# Altium PCB Accumulator_HotDog.PcbDoc
Units mm, origin at the board's own origin, x right, y up, seen from the top; angles counter-clockwise.
Board outline 537 x 59 mm, 2 copper layers (Top Layer, Bottom Layer), stack 1.57 mm thick; 117 components, 86 nets, 238 pads, 157 vias.
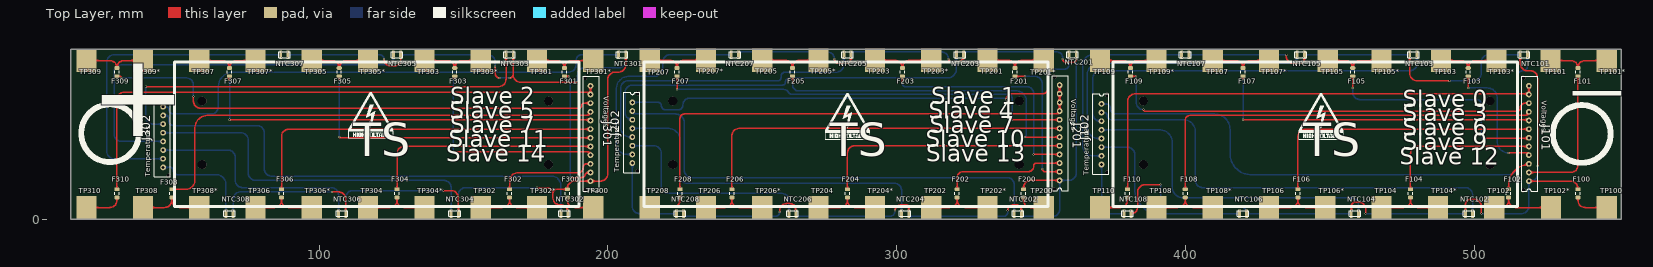
[diagram p0: Top Layer view]
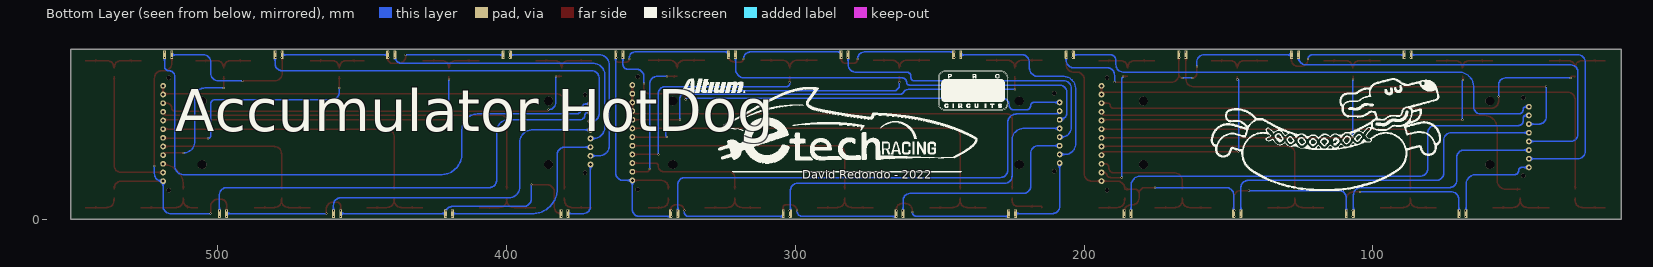
[diagram p1: Bottom Layer view, seen from below]
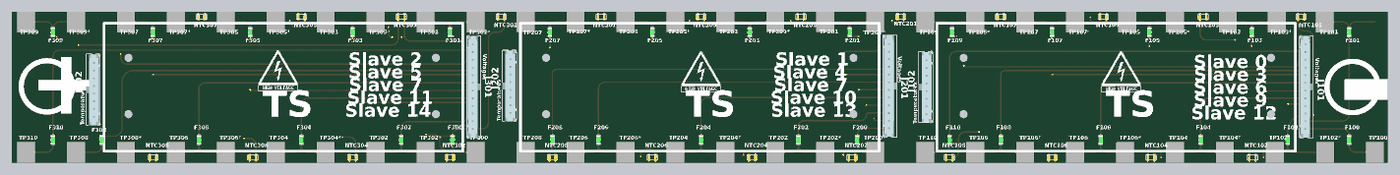
[diagram p2: 3D render of the assembled board from above, using the file's embedded part models]

## Layer stack, top to bottom
Top Solder: solder mask 0.01, Solder Resist, Dk 3.5
Top Layer: signal copper 0.035
Dielectric 1: dielectric 1.5, FR-4, Dk 4.8
Bottom Layer: signal copper 0.035
Bottom Solder: solder mask 0.01, Solder Resist, Dk 3.5

## Board outline
14,0 14,59 551,59 551,0

## Design rules (kind name [scope] priority, off if disabled: settings)
Clearance [All] p1: gap=0.6 ignorepadtopadclearanceinfootprint=FALSE except(0: Arc-Hole Track-Hole SMDPad-Hole THPad-Hole Via-Hole Fill-Hole Poly-Hole Region-Hole Text-Hole)
PolygonConnect [All] p1: connectstyle=Relief reliefconductorwidth=0.254 reliefentries=4 polygonreliefangle="90 Angle" airgapwidth=0.254
RoomDefinition Accumulator_HotDog [InComponentClass('Accumulator_HotDog')] p1: confinementstyle=ConfineIn formatcopy=TRUE lockcomponents=FALSE outline 0,0 551,0 551,59.5 0,59.5
RoutingVias [All] p1: holewidth=0.3 width=0.7 viastyle="Through Hole" minholewidth=0.2 minwidth=0.3 maxholewidth=20 maxwidth=30
SolderMaskExpansion [All] p1: expansion=0.102 istentingtop=FALSE
Width [All] p1: maxlimit=5 minlimit=0.2 preferedwidth=1
30 further rules are at their usual default settings.

## Components (designator, comment, footprint, x,y, rotation, side; value= is the part's Value field where it differs from the comment)
F100 "0437001.WRA" Fuse_1206 536,9 r90 top
F101 "0437001.WRA" Fuse_1206 536,51 r270 top
F102 "0437001.WRA" Fuse_1206 512,9 r90 top
F103 "0437001.WRA" Fuse_1206 498,51 r270 top
F104 "0437001.WRA" Fuse_1206 478,9 r90 top
F105 "0437001.WRA" Fuse_1206 458,51 r270 top
F106 "0437001.WRA" Fuse_1206 439,9 r90 top
F107 "0437001.WRA" Fuse_1206 420,51 r270 top
F108 "0437001.WRA" Fuse_1206 400,9 r90 top
F109 "0437001.WRA" Fuse_1206 381,51 r270 top
F110 "0437001.WRA" Fuse_1206 380,9 r90 top
F200 "0437001.WRA" Fuse_1206 344,9 r90 top
F201 "0437001.WRA" Fuse_1206 341,51 r270 top
F202 "0437001.WRA" Fuse_1206 321,9 r90 top
F203 "0437001.WRA" Fuse_1206 302,51 r270 top
F204 "0437001.WRA" Fuse_1206 283,9 r90 top
F205 "0437001.WRA" Fuse_1206 264,51 r270 top
F206 "0437001.WRA" Fuse_1206 243,9 r90 top
F207 "0437001.WRA" Fuse_1206 224,51 r270 top
F208 "0437001.WRA" Fuse_1206 225,9 r90 top
F300 "0437001.WRA" Fuse_1206 186,9 r90 top
F301 "0437001.WRA" Fuse_1206 185,51 r270 top
F302 "0437001.WRA" Fuse_1206 166,9 r90 top
F303 "0437001.WRA" Fuse_1206 147,51 r270 top
F304 "0437001.WRA" Fuse_1206 127,9 r90 top
F305 "0437001.WRA" Fuse_1206 107,51 r270 top
F306 "0437001.WRA" Fuse_1206 87,9 r90 top
F307 "0437001.WRA" Fuse_1206 69,51 r270 top
F308 "0437001.WRA" Fuse_1206 49,9 r90 top
F309 "0437001.WRA" Fuse_1206 30,51 r270 top
F310 "0437001.WRA" Fuse_1206 30,9 r90 top
J101 "J_MicroFit_1x12_V" J_MicroFit_1x12_V 519,13.25 r270 top
J102 "J_MicroFit_1x8_V" J_MicroFit_1x8_V 371,40 r90 top
J201 "J_MicroFit_1x12_V" J_MicroFit_1x12_V 356.5,13.5 r270 top
J202 "J_MicroFit_1x8_V" J_MicroFit_1x8_V 208.5,40.5 r90 top
J301 "J_MicroFit_1x12_V" J_MicroFit_1x12_V 194,13.25 r270 top
J302 "J_MicroFit_1x8_V" J_MicroFit_1x8_V 46,39 r90 top
NTC101 "NXRT15XV103FA1B040" NTC_NXRT15XV103FA1B040 517.25,57 r0 top
NTC102 "NXRT15XV103FA1B040" NTC_NXRT15XV103FA1B040 498.25,2 r0 top
NTC103 "NXRT15XV103FA1B040" NTC_NXRT15XV103FA1B040 479,57 r0 top
NTC104 "NXRT15XV103FA1B040" NTC_NXRT15XV103FA1B040 458.75,2 r0 top
NTC105 "NXRT15XV103FA1B040" NTC_NXRT15XV103FA1B040 440,57 r0 top
NTC106 "NXRT15XV103FA1B040" NTC_NXRT15XV103FA1B040 420,2 r0 top
NTC107 "NXRT15XV103FA1B040" NTC_NXRT15XV103FA1B040 400,57 r0 top
NTC108 "NXRT15XV103FA1B040" NTC_NXRT15XV103FA1B040 380,2 r0 top
NTC201 "NXRT15XV103FA1B040" NTC_NXRT15XV103FA1B040 361,57 r180 top
NTC202 "NXRT15XV103FA1B040" NTC_NXRT15XV103FA1B040 342,2 r180 top
NTC203 "NXRT15XV103FA1B040" NTC_NXRT15XV103FA1B040 322,57 r180 top
NTC204 "NXRT15XV103FA1B040" NTC_NXRT15XV103FA1B040 303,2 r180 top
NTC205 "NXRT15XV103FA1B040" NTC_NXRT15XV103FA1B040 283,57 r0 top
NTC206 "NXRT15XV103FA1B040" NTC_NXRT15XV103FA1B040 264,2 r0 top
NTC207 "NXRT15XV103FA1B040" NTC_NXRT15XV103FA1B040 244,57 r0 top
NTC208 "NXRT15XV103FA1B040" NTC_NXRT15XV103FA1B040 225,2 r0 top
NTC301 "NXRT15XV103FA1B040" NTC_NXRT15XV103FA1B040 205,57 r180 top
NTC302 "NXRT15XV103FA1B040" NTC_NXRT15XV103FA1B040 185,2 r180 top
NTC303 "NXRT15XV103FA1B040" NTC_NXRT15XV103FA1B040 166,57 r180 top
NTC304 "NXRT15XV103FA1B040" NTC_NXRT15XV103FA1B040 147,2 r180 top
NTC305 "NXRT15XV103FA1B040" NTC_NXRT15XV103FA1B040 127,57 r0 top
NTC306 "NXRT15XV103FA1B040" NTC_NXRT15XV103FA1B040 108,2 r0 top
NTC307 "NXRT15XV103FA1B040" NTC_NXRT15XV103FA1B040 88,57 r0 top
NTC308 "NXRT15XV103FA1B040" NTC_NXRT15XV103FA1B040 69,2 r0 top
TP100 "TestPoint" TestPoint#1 546,4.102 r90 top
TP101 "TestPoint" TestPoint#2 526.916,55 r90 top
TP101* "TestPoint" TestPoint#3 556.241,55 r90 top
TP102 "TestPoint" TestPoint#1 507,4.102 r90 top
TP102* "TestPoint" TestPoint#4 526.5,4.203 r90 top
TP103 "TestPoint" TestPoint#5 487.5,55 r90 top
TP103* "TestPoint" TestPoint#6 507,55 r90 top
TP104 "TestPoint" TestPoint#1 468,4.102 r90 top
TP104* "TestPoint" TestPoint#1 487.5,4.102 r90 top
TP105 "TestPoint" TestPoint#7 448.5,55 r90 top
TP105* "TestPoint" TestPoint#1 468,55 r90 top
TP106 "TestPoint" TestPoint#1 429,4.102 r90 top
TP106* "TestPoint" TestPoint#1 448.5,4.102 r90 top
TP107 "TestPoint" TestPoint#1 409.5,55 r90 top
TP107* "TestPoint" TestPoint#1 429,55 r90 top
TP108 "TestPoint" TestPoint#8 379.723,4.102 r90 top
TP108* "TestPoint" TestPoint#9 395.228,4.102 r90 top
TP109 "TestPoint" TestPoint#10 374.495,55 r90 top
TP109* "TestPoint" TestPoint#1 390,55 r90 top
TP110 "TestPoint" TestPoint#11 352.868,4.102 r90 top
TP200 "TestPoint" TestPoint#1 351,4.102 r90 top
TP201 "TestPoint" TestPoint#1 331.5,55.102 r90 top
TP201* "TestPoint" TestPoint#1 351,55.102 r90 top
TP202 "TestPoint" TestPoint#1 312,4.102 r90 top
TP202* "TestPoint" TestPoint#1 331.5,4.102 r90 top
TP203 "TestPoint" TestPoint#1 292.5,55.102 r90 top
TP203* "TestPoint" TestPoint#1 312,55.102 r90 top
TP204 "TestPoint" TestPoint#1 273,4.102 r90 top
TP204* "TestPoint" TestPoint#1 292.5,4.102 r90 top
TP205 "TestPoint" TestPoint#1 253.5,55.102 r90 top
TP205* "TestPoint" TestPoint#1 273,55.102 r90 top
TP206 "TestPoint" TestPoint#1 234,4.102 r90 top
TP206* "TestPoint" TestPoint#1 253.5,4.102 r90 top
TP207 "TestPoint" TestPoint#1 214.5,55.102 r90 top
TP207* "TestPoint" TestPoint#1 234,55.102 r90 top
TP208 "TestPoint" TestPoint#1 214.5,4.102 r90 top
TP300 "TestPoint" TestPoint#1 195,4.102 r90 top
TP301 "TestPoint" TestPoint#1 175.5,55 r90 top
TP301* "TestPoint" TestPoint#1 195,55 r90 top
TP302 "TestPoint" TestPoint#1 156,4.102 r90 top
TP302* "TestPoint" TestPoint#1 175.5,4.102 r90 top
TP303 "TestPoint" TestPoint#1 136.5,55 r90 top
TP303* "TestPoint" TestPoint#1 156,55 r90 top
TP304 "TestPoint" TestPoint#1 117,4.102 r90 top
TP304* "TestPoint" TestPoint#1 136.5,4.102 r90 top
TP305 "TestPoint" TestPoint#1 97.5,55 r90 top
TP305* "TestPoint" TestPoint#1 117,55 r90 top
TP306 "TestPoint" TestPoint#1 78,4.102 r90 top
TP306* "TestPoint" TestPoint#1 97.5,4.102 r90 top
TP307 "TestPoint" TestPoint#1 58.5,55 r90 top
TP307* "TestPoint" TestPoint#1 78,55 r90 top
TP308 "TestPoint" TestPoint#1 39,4.102 r90 top
TP308* "TestPoint" TestPoint#1 58.5,4.102 r90 top
TP309 "TestPoint" TestPoint#1 19.5,55 r90 top
TP309* "TestPoint" TestPoint#1 39,55 r90 top
TP310 "TestPoint" TestPoint#1 19.5,4.102 r90 top

## Footprints (in the part's own frame and the unit in brackets; to place one, negate y for a bottom-side part, rotate by r counter-clockwise, add the part's x,y. Pads: shape width x height; smd on the part's side, far side on the other; paste and mask are expansions set on the pad)
Fuse_1206 [mm] "Chip Resistor, 2-Leads, Body 3,20x1,58mm, IPC Medium Density"
  rrect50% 1.25x1.75 smd: 1(-1.425,0) 2(1.425,0)
  silkscreen extent -0.4,-0.77 0.4,0.77, body extent -1.6,-0.79 1.6,0.79, height 0.86
J_MicroFit_1x8_V [mm]
  round 2 hole 1.02: 1(0,0) 2(-3,0) 3(-6,0) 4(-9,0) 5(-12,0) 6(-15,0) 7(-18,0) 8(-21,0)
  silkscreen extent -24.3,-2.5 3.5,3, body extent -24.32,-2.52 3.32,3.05, height 10
J_MicroFit_1x12_V [mm]
  round 2 hole 1.02: 1(0,0) 2(-3,0) 3(-6,0) 4(-9,0) 5(-12,0) 6(-15,0) 7(-18,0) 8(-21,0) 9(-24,0) 10(-27,0) 11(-30,0) 12(-33,0)
  silkscreen extent -36.3,-2.5 3.5,3, body extent -36.27,-2.61 3.37,2.96, height 10
NTC_NXRT15XV103FA1B040 [mm]
  rrect50% 1x3 all layers, no hole: 1(-1.25,0) 2(1.25,0)
  silkscreen extent -2,-1 2,1
TestPoint#1 [mm]
  rect 8x7 smd: 1(0,0)
TestPoint#2 [mm]
  rect 8x7 smd: 1(0,0.416)
TestPoint#3 [mm]
  rect 8x7 smd: 1(0,10.241)
TestPoint#4 [mm]
  rect 8x7 smd: 1(-0.102,-0.208)
TestPoint#5 [mm]
  rect 8x7 smd: 1(0,-1.097)
TestPoint#6 [mm]
  rect 8x7 smd: 1(0,-0.774)
TestPoint#7 [mm]
  rect 8x7 smd: 1(0,-0.832)
TestPoint#8 [mm]
  rect 8x7 smd: 1(0,-10.277)
TestPoint#9 [mm]
  rect 8x7 smd: 1(0,-14.272)
TestPoint#10 [mm]
  rect 8x7 smd: 1(0,3.995)
TestPoint#11 [mm]
  rect 8x7 smd: 1(0,-17.632)

## Part data
F100 F101 F102 F103 F104 F105 F106 F107 F108 F109 F110 F200 F201 F202 F203 F204 F205 F206 F207 F208 F300 F301 F302 F303 F304 F305 F306 F307 F308 F309 F310: library part Fuse_1A_63V_1206, "Fuse Chip Fast Acting 1A 63V SMD Solder Pad 1206 Ceramic T/R Automotive", Case Code (Imperial)=1206, Case Code (Metric)=3216, Current Rating=1A, Manufacturer=Littelfuse, Max Operating Temperature=150°C, Min Operating Temperature=-55°C, Supplier Part Number 1=F10001CT-ND, Voltage Rating (AC)=63V, Approvals=CSA,cURus, Case/Package=1206, Category=Fuses, ComponentLink1Description=https://www.littelfuse.com/~/media/electronics/datasheets/fuses/littelfuse_fuse_437a_datasheet.pdf.pdf?src-supplier=Digi-Key, ComponentLink1URL=https://www.littelfuse.com/~/media/electronics/datasheets/fuses/littelfuse_fuse_437a_datasheet.pdf.pdf?src-supplier=Digi-Key, ComponentLink2Description="Where buy it", ComponentLink2URL=https://www.mouser.es/ProductDetail/Littelfuse/0437001WRA?qs=DXv0QSHKF4z9CJhPXjxR%252BA%3D%3D, Fuse Type="Board Mount (Cartridge Style Excluded)", Manufacturer part number=0437001.WRA, Mount="Surface Mount", Packaging="Tape and Reel", Pricing 1="1=1,52000, 5=1,47000, 10=1,37600, 50=1,13860, 100=0,94880, 250=0,92508, 500=0,78276, 1000=0,68788 (USD)", RoHS=Yes, Stock 1=5820, Supplier 1=Digi-Key, Voltage Rating (DC)=63V
J101 J201 J301: "Conn Power HDR 12 POS 3mm Solder ST Thru-Hole 12 Terminal 1 Port Micro-Fit 3.0™ Tray", Manufacturer 1=Molex, Manufacturer Part Number 1=43650-1215, Supplier Part Number 1=0436501215, Category="Headers and Wire Housings", ComponentLink1Description=https://datasheet.ciiva.com/712/436500316-sd-712050.pdf?src-supplier=Digi-Key, ComponentLink1URL=https://datasheet.ciiva.com/712/436500316-sd-712050.pdf?src-supplier=Digi-Key, ComponentLink2Description=https://datasheet.ciiva.com/5154/0436501215-pcb-headers-148827-5154953.pdf?src-supplier=Mouser, ComponentLink2URL=https://datasheet.ciiva.com/5154/0436501215-pcb-headers-148827-5154953.pdf?src-supplier=Mouser, ComponentLink3Description=https://datasheet.ciiva.com/16088/0436501215-pcb-headers-16088773.pdf?src-supplier=Onlinecomponents.com, ComponentLink3URL=https://datasheet.ciiva.com/16088/0436501215-pcb-headers-16088773.pdf?src-supplier=Onlinecomponents.com, ComponentLink4Description=https://datasheet.ciiva.com/30150/206240436501215-pcb-headers-30150375.pdf?src-supplier=Onlinecomponents.com, ComponentLink4URL=https://datasheet.ciiva.com/30150/206240436501215-pcb-headers-30150375.pdf?src-supplier=Onlinecomponents.com, Pricing 1="816=1,58731, 1632=1,28652, 3264=1,08716, 4896=1,05565, 6528=0,89063 (USD)", RoHS=Yes, Stock 1=1632, Supplier 1=Avnet
J102 J202 J302: "Conn Wire to Board HDR 8 POS 3mm Solder ST Top Entry Thru-Hole Micro-Fit 3.0™ Tray", Manufacturer 1=Molex, Manufacturer Part Number 1=43650-1200, Manufacturer Part Number 2=43650-0815, Supplier Part Number 1=01AH1239, .Creator=DR, Category="Headers and Wire Housings", ComponentLink1Description=https://datasheet.ciiva.com/16085/281240436500815-pcb-headers-16085998.pdf?src-supplier=Onlinecomponents.com, ComponentLink1URL=https://datasheet.ciiva.com/16085/281240436500815-pcb-headers-16085998.pdf?src-supplier=Onlinecomponents.com, ComponentLink2Description=https://datasheet.ciiva.com/5151/0436500815-pcb-headers-148729-5151340.pdf?src-supplier=Mouser, ComponentLink2URL=https://datasheet.ciiva.com/5151/0436500815-pcb-headers-148729-5151340.pdf?src-supplier=Mouser, ComponentLink3Description=https://datasheet.ciiva.com/26916/getdatasheetpartid-78997-26916336.pdf?src-supplier=Verical, ComponentLink3URL=https://datasheet.ciiva.com/26916/getdatasheetpartid-78997-26916336.pdf?src-supplier=Verical, ComponentLink4Description=https://datasheet.ciiva.com/30117/57400436500815-pcb-headers-30117736.pdf?src-supplier=Onlinecomponents.com, ComponentLink4URL=https://datasheet.ciiva.com/30117/57400436500815-pcb-headers-30117736.pdf?src-supplier=Onlinecomponents.com, Manufacturer 2=Molex, Pricing 1="1=3,36000, 10=2,96000, 25=2,76000, 50=2,56000, 100=2,36000, 250=2,08000 (USD)", Pricing 2="1=1,89510, 10=1,68890, 80=1,45980, 1122=1,20850, 5610=1,08880 (USD)", RoHS=Yes, Stock 1=13, Stock 2=2244, Supplier 1=Newark, Supplier 2="Arrow Electronics", Supplier Part Number 2=43650-0815
NTC101 NTC102 NTC103 NTC104 NTC105 NTC106 NTC107 NTC108 NTC201 NTC202 NTC203 NTC204 NTC205 NTC206 NTC207 NTC208 NTC301 NTC302 NTC303 NTC304 NTC305 NTC306 NTC307 NTC308: library part NTC_NXRT15XV103FA1B040, "NXR Series 10 kOhm 3900 K ±1% Bead NTC Thermistor Sensor", Manufacturer 1=Murata, Max Operating Temperature=125°C, Max power dissipation=7.5mW, Min Operating Temperature=-40°C, Package Quantity=500, Resistance=10kR, Resistance Tolerance=1%, Supplier Part Number 1=490-7171-ND, Category=Thermistors, ComponentLink1Description=http://www.mouser.com/ds/2/281/r44e-3685.pdf?src-supplier=Mouser, ComponentLink1URL=http://www.mouser.com/ds/2/281/r44e-3685.pdf?src-supplier=Mouser, ComponentLink2Description=https://www.murata.com/en-us/products/productdata/8796838297630/S0423E.pdf?src-supplier=Digi-Key, ComponentLink2URL=https://www.murata.com/en-us/products/productdata/8796838297630/S0423E.pdf?src-supplier=Digi-Key, ComponentLink3Description=http://www.murata.com/~/media/webrenewal/support/library/catalog/products/thermistor/ntc/r44e.ashx?src-supplier=Avnet, ComponentLink3URL=http://www.murata.com/~/media/webrenewal/support/library/catalog/products/thermistor/ntc/r44e.ashx?src-supplier=Avnet, Height=2mm, Lead Diameter=0.4mm, Lead Free="Lead Free", Lead Pitch=2.5mm, Length=5mm, Manufacturer Part Number 1=NXRT15XV103FA1B040, Mount="Through Hole", Number of Pins=2, Packaging=Bulk, Power rating=7.5mW, Pricing 1="1=0,63000, 5=0,60000, 10=0,52300, 25=0,45920, 50=0,38140, 100=0,32490, 500=0,28248, 1000=0,24717, 5000=0,21892 (USD)", RoHS=Yes, RoHS Compliant=No, Series=NXR, Stock 1=38458, Supplier 1=Digi-Key, Termination=Radial, Tolerance=1%, Width=4mm
TP100 TP101 TP101* TP102 TP102* TP103 TP103* TP104 TP104* TP105 TP105* TP106 TP106* TP107 TP107* TP108 TP108* TP109 TP109* TP110 TP200 TP201 TP201* TP202 TP202* TP203 TP203* TP204 TP204* TP205 TP205* TP206 TP206* TP207 TP207* TP208 TP300 TP301 TP301* TP302 TP302* TP303 TP303* TP304 TP304* TP305 TP305* TP306 TP306* TP307 TP307* TP308 TP308* TP309 TP309* TP310: "Test Point 1x1 mm", Category=TestPoint

## Free pads (board coordinates)
  round 3 hole 3.2: 0(59.5,19) 0(59.5,41) 0(179.5,19) 0(179.5,41) 0(222.5,19) 0(222.5,41) 0(342.5,19) 0(342.5,41) 0(385.5,19) 0(385.5,41) 0(505.5,19) 0(505.5,41)

## Via types
v1: diameter 0.7, hole 0.2, Top Layer to Bottom Layer, 96 vias
v2: diameter 0.7, hole 0.3, Top Layer to Bottom Layer, 49 vias
v3: diameter 1.5, hole 1.5, Top Layer to Bottom Layer, 12 vias

## Nets (pads, with @x,y where several pads share a name; then routed paths per layer and width w, separated by ;. In a path a pad name is that pad's centre, name@x,y a point inside that pad or via, vN(x,y) a via of type N, cw(c..) or ccw(c..) an arc to the next point about the centre after c; other vN are vias at no path point)
GND_Slave_1: F100.2 J101.1 NTC101.1 NTC102.1 NTC103.1 NTC104.1 NTC105.2 NTC106.2 NTC107.2 NTC108.2 | length 379.9
  Top Layer w0.5: NTC108.2 ccw(c381.25,4.25) 383.5,4.25 383.5,9.46 cw(c386.04,9.46) 386.04,12 v2(391.5,12) ; v2(435,57) 435,56.54 ccw(c437.54,56.54) 437.54,54 439.5,54 ccw(c439.5,55.75) 441.25,55.75 NTC105.2 ; NTC104.1 457.5,4.5 cw(c459,4.5) 459,6 459.96,6 cw(c459.96,3.46) 462.5,3.46 v2(462.5,2) ; NTC103.1 477.75,50.54 ccw(c480.29,50.54) 480.29,48 v2(491.5,48) ; NTC102.1 497,5 cw(c499,5) 499,7 500.01,7 cw(c500.01,4.46) 502.55,4.46 v2(502.55,2) ; NTC101.1 516,54 ccw(c518.5,54) 518.5,51.5 519.46,51.5 cw(c519.46,48.96) 522,48.96 v2(522,18.5) ; J101.1 533.46,13.25 cw(c533.46,10.71) 536,10.71 F100.2
  Bottom Layer w0.5: v2(391.5,12) 391.5,7.04 ccw(c394.04,7.04) 394.04,4.5 418.75,4.5 cw(c418.75,2) NTC106.2 NTC104.1 ; NTC107.2 v2(435,57) ; NTC105.2 NTC103.1 ; v2(462.5,2) NTC102.1 ; v2(491.5,48) 499.96,48 ccw(c499.96,50.54) 502.5,50.54 502.5,54.46 cw(c505.04,54.46) 505.04,57 NTC101.1 ; v2(502.55,2) 516.46,2 ccw(c516.46,4.54) 519,4.54 J101.1 519.46,13.25 ccw(c519.46,15.79) 522,15.79 v2(522,18.5)
  other v1: 381,1 421,1 457.5,1 497,1 381,3 421,3 457.5,3 497,3 401,56 441,56 478,56 516,56 401,58 441,58 478,58 516,58
GND_Slave_2: F200.2 J201.1 NTC201.1 NTC202.1 NTC203.1 NTC204.1 NTC205.2 NTC206.2 NTC207.2 NTC208.2 | length 350
  Top Layer w0.5: v2(259.5,2.5) 259.5,2.96 cw(c262.04,2.96) 262.04,5.5 263,5.5 cw(c263,3.5) 265,3.5 v1(265,3) ; v2(278.5,55.5) ccw(c280,55.5) 280,54 282.5,54 ccw(c282.5,55.75) 284.25,55.75 NTC205.2 ; v2(299.5,3) cw(c301.5,3) 301.5,5 303.5,5 cw(c303.5,4.25) 304.25,4.25 NTC204.1 ; v2(318,55.5) ccw(c319,55.5) 319,54.5 321,54.5 ccw(c321,56.75) 323.25,56.75 NTC203.1 ; v2(338.5,3) cw(c340.5,3) 340.5,5 341.5,5 cw(c341.5,3.25) 343.25,3.25 NTC202.1 ; F200.2 344,10.96 cw(c346.54,10.96) 346.54,13.5 J201.1 ; v2(357.5,55.5) ccw(c358.5,55.5) 358.5,54.5 361.5,54.5 ccw(c361.5,55.25) 362.25,55.25 NTC201.1
  Bottom Layer w0.5: v1(226,1) 258,1 ccw(c258,2.5) v2(259.5,2.5) ; v1(245,58) 276,58 cw(c276,55.5) v2(278.5,55.5) ; v1(265,1) 297.5,1 ccw(c297.5,3) v2(299.5,3) ; v1(284,58) 315.5,58 cw(c315.5,55.5) v2(318,55.5) ; NTC204.1 ccw(c305.25,2) 305.25,1 337,1 ccw(c337,2.5) 338.5,2.5 v2(338.5,3) ; NTC203.1 cw(c324.25,57) 324.25,58 355.5,58 cw(c355.5,56) 357.5,56 v2(357.5,55.5) ; v1(343,1) 353.96,1 ccw(c353.96,3.54) 356.5,3.54 J201.1 359.71,13.5 ccw(c359.71,16.04) 362.25,16.04 NTC201.1
  other v1: 304,1 226,3 304,3 343,3 245,56 284,56 323,56 362,56 323,58 362,58
GND_Slave_3: F300.2 J301.1 NTC301.1 NTC302.1 NTC303.1 NTC304.1 NTC305.2 NTC306.2 NTC307.2 NTC308.2 | length 369.8
  Top Layer w0.5: v2(104.5,9.5) 106.71,9.5 cw(c106.71,6.96) 109.25,6.96 NTC306.2 ; v2(122.5,55.5) ccw(c125,55.5) 125,53 126,53 ccw(c126,55.25) 128.25,55.25 NTC305.2 ; v2(143,10) 145.71,10 cw(c145.71,7.46) 148.25,7.46 NTC304.1 ; v2(161,53) 161,50.5 ccw(c162.5,50.5) v2(162.5,49) ; v2(166,49) ccw(c166,50.25) 167.25,50.25 ; NTC303.1 167.25,50.25 ; v2(175.5,11) 179,11 cw(c179,9) 181,9 ; NTC302.1 186.25,2.46 ccw(c183.71,2.46) 183.71,5 183.5,5 cw(c183.5,7.5) 181,7.5 181,9 ; v2(189.5,47.5) 169.79,47.5 cw(c169.79,50.04) 167.25,50.04 167.25,50.25 ; NTC301.1 206.25,53.54 cw(c203.71,53.54) 203.71,51 202.54,51 ccw(c202.54,48.46) 200,48.46 200,15.79 cw(c197.46,15.79) 197.46,13.25 J301.1 188.54,13.25 ccw(c188.54,10.71) 186,10.71 F300.2 182.425,10.425 ccw(c182.425,9) 181,9
  Bottom Layer w0.5: NTC308.2 70.25,6.96 cw(c72.79,6.96) 72.79,9.5 v2(104.5,9.5) ; NTC307.2 121,57 cw(c121,55.5) v2(122.5,55.5) ; NTC306.2 109.25,7.46 cw(c111.79,7.46) 111.79,10 v2(143,10) ; NTC305.2 158.46,57 cw(c158.46,54.46) 161,54.46 v2(161,53) ; NTC304.1 148.25,8.46 cw(c150.79,8.46) 150.79,11 v2(175.5,11) ; v2(162.5,49) v2(166,49) ; v2(189.5,47.5) 189.5,49.96 cw(c192.04,49.96) 192.04,52.5 203.71,52.5 ccw(c203.71,55.04) 206.25,55.04 NTC301.1
  other v1: 70,1 109,1 148,1 186,1 70,3 109,3 148,3 186,3 89,56 128,56 167,56 206,56 89,58 128,58 167,58 206,58
NetF100_1: F100.1 TP100.1 | length 12.4
  Top Layer w0.5: F100.1 536,6.642 ccw(c538.54,6.642) 538.54,4.102 TP100.1
NetF101_1: F101.1 TP101*.1 TP101.1 | length 22.4
  Top Layer w0.5: TP101.1 533.46,55 cw(c533.46,52.46) F101.1@536,52.46 ; F101.1 F101.1@536,52.46 ; TP101*.1 538.54,55 ccw(c538.54,52.46) F101.1@536,52.46
NetF101_2: F101.2 J101.2 | length 49.2
  Top Layer w0.5: J101.2 533.46,16.25 ccw(c533.46,18.79) 536,18.79 F101.2
NetF102_1: F102.1 TP102*.1 TP102.1 | length 23.5
  Top Layer w0.5: TP102.1 509.46,4.102 ccw(c509.46,6.642) 512,6.642 ; F102.1 512,6.642 ; TP102*.1 514.54,4.102 cw(c514.54,6.642) 512,6.642
NetF102_2: F102.2 J101.3 | length 12.6
  Top Layer w0.5: F102.2 512,11.919 cw(c519,11.919) 518.558,18.905 ccw(c518.524,19.404) J101.3
NetF103_1: F103.1 TP103*.1 TP103.1 | length 22.1
  Top Layer w0.5: TP103.1 495.46,55 cw(c495.46,52.46) F103.1@498,52.46 ; F103.1 F103.1@498,52.46 ; TP103*.1 500.54,55 ccw(c500.54,52.46) F103.1@498,52.46
NetF103_2: F103.2 J101.4 | length 45.2
  Top Layer w0.5: v2(498,45.5) F103.2 ; v2(512,23) 518.25,23 cw(c518.25,22.25) J101.4 J101.4@518.75,22.5
  Bottom Layer w0.5: v2(498,45.5) 504.636,45.5 cw(c504.636,42.136) 508,42.136 508,27 ccw(c512,27) v2(512,23)
NetF104_1: F104.1 TP104*.1 TP104.1 | length 23.3
  Top Layer w0.5: TP104.1 475.46,4.102 ccw(c475.46,6.642) 478,6.642 ; F104.1 478,6.642 ; TP104*.1 480.54,4.102 cw(c480.54,6.642) 478,6.642
NetF104_2: F104.2 J101.5 | length 54.7
  Top Layer w0.5: F104.2 478,22.71 cw(c480.54,22.71) 480.54,25.25 J101.5
NetF105_1: F105.1 TP105*.1 TP105.1 | length 21.6
  Top Layer w0.5: TP105.1 455.46,55 cw(c455.46,52.46) F105.1@458,52.46 ; F105.1 F105.1@458,52.46 ; TP105*.1 460.54,55 ccw(c460.54,52.46) F105.1@458,52.46
NetF105_2: F105.2 J101.6 | length 80.5
  Top Layer w0.5: v2(458,45.5) F105.2 ; v2(503.5,28) 503.538,28.038 518.788,28.038 J101.6
  Bottom Layer w0.5: v2(458,45.5) 458,44.04 ccw(c460.54,44.04) 460.54,41.5 500.96,41.5 cw(c500.96,39.96) 502.5,39.96 502.5,29 ccw(c503.5,29) v2(503.5,28)
NetF106_1: F106.1 TP106*.1 TP106.1 | length 23.3
  Top Layer w0.5: TP106.1 436.46,4.102 ccw(c436.46,6.642) 439,6.642 ; F106.1 439,6.642 ; TP106*.1 441.54,4.102 cw(c441.54,6.642) 439,6.642
NetF106_2: F106.2 J101.7 | length 99.7
  Top Layer w0.5: F106.2 439,28.71 cw(c441.54,28.71) 441.54,31.25 J101.7
NetF107_1: F107.1 TP107*.1 TP107.1 | length 22.4
  Top Layer w0.5: TP107.1 417.46,55 cw(c417.46,52.46) F107.1@420,52.46 ; F107.1 F107.1@420,52.46 ; TP107*.1 422.54,55 ccw(c422.54,52.46) F107.1@420,52.46
NetF107_2: F107.2 J101.8 | length 114.2
  Top Layer w0.5: v2(420,34.5) 518.75,34.5 J101.8 ; v2(420,48.5) F107.2
  Bottom Layer w0.5: v2(420,34.5) v2(420,48.5)
NetF108_1: F108.1 TP108*.1 TP108.1 | length 23.3
  Top Layer w0.5: TP108.1 397.46,4.102 ccw(c397.46,6.642) 400,6.642 ; F108.1 400,6.642 ; TP108*.1 402.54,4.102 cw(c402.54,6.642) 400,6.642
NetF108_2: F108.2 J101.9 | length 144.6
  Top Layer w0.5: F108.2 400,34.311 cw(c401.689,34.311) 401.689,36 517.75,36 ccw(c517.75,37.25) J101.9
NetF109_1: F109.1 TP109*.1 TP109.1 | length 22.4
  Top Layer w0.5: TP109.1 378.46,55 cw(c378.46,52.46) F109.1@381,52.46 ; F109.1 F109.1@381,52.46 ; TP109*.1 383.54,55 ccw(c383.54,52.46) F109.1@381,52.46
NetF109_2: F109.2 J101.10 | length 150.3
  Top Layer w0.5: F109.2 381.038,49.538 382.963,49.538 v2(383,49.5) ; v2(385.5,38) ccw(c386,38) 386,37.5 386.5,37.5 515,37.5 ccw(c515,38.5) 516,38.5 cw(c517.75,38.5) 517.75,40.25 J101.10
  Bottom Layer w0.5: v2(383,49.5) 383,40.5 ccw(c385.5,40.5) v2(385.5,38)
NetF110_1: F110.1 TP110.1 | length 11.9
  Top Layer w0.5: TP110.1 377.46,4.102 ccw(c377.46,6.642) 377.71,4.114 ccw(c377.659,4.611) 377.921,4.185 cw(c378.5,3.25) 378.456,4.349 ccw(c378.433,4.849) 378.669,4.408 ccw(c377.46,6.642) 380,6.642 F110.1
NetF110_2: F110.2 J101.11 J101.12 | length 174
  Top Layer w0.5: F110.2 380,40.71 cw(c382.79,40.71) 382.79,43.5 518.75,43.5 J101.11 519,43.5 J101.12
NetF200_1: F200.1 TP200.1 | length 9.4
  Top Layer w0.5: F200.1 344,6.642 ccw(c346.54,6.642) 346.54,4.102 TP200.1
NetF201_1: F201.1 TP201*.1 TP201.1 | length 22.5
  Top Layer w0.5: TP201.1 338.46,55.102 cw(c338.46,52.562) F201.1@341,52.562 ; F201.1 F201.1@341,52.562 ; TP201*.1 343.54,55.102 ccw(c343.54,52.562) F201.1@341,52.562
NetF201_2: F201.2 J201.2 | length 47
  Top Layer w0.5: F201.2 ccw(c341.075,49.575) 341.075,49.5 v2(344.5,49.5) ; v2(350.5,17.5) ccw(c351.5,17.5) 351.5,16.5 J201.2
  Bottom Layer w0.5: v2(344.5,49.5) 347.96,49.5 cw(c347.96,46.96) 350.5,46.96 v2(350.5,17.5)
NetF202_1: F202.1 TP202*.1 TP202.1 | length 23.3
  Top Layer w0.5: TP202.1 318.46,4.102 ccw(c318.46,6.642) 321,6.642 ; F202.1 321,6.642 ; TP202*.1 323.54,4.102 cw(c323.54,6.642) 321,6.642
NetF202_2: F202.2 J201.3 | length 42.4
  Top Layer w0.5: F202.2 321,14.5 cw(c323,14.5) 323,16.5 345.5,16.5 ccw(c345.5,18.5) 347.5,18.5 cw(c348.5,18.5) 348.5,19.5 J201.3
NetF203_1: F203.1 TP203*.1 TP203.1 | length 22.5
  Top Layer w0.5: TP203.1 299.46,55.102 cw(c299.46,52.562) F203.1@302,52.562 ; F203.1 F203.1@302,52.562 ; TP203*.1 304.54,55.102 ccw(c304.54,52.562) F203.1@302,52.562
NetF203_2: F203.2 J201.4 | length 80.1
  Top Layer w0.5: v2(302,47.5) F203.2 ; v2(347.5,22.5) J201.4
  Bottom Layer w0.5: v2@302.038,47.462 v2(302,47.5) 302,47 ccw(c303,47) 303,46 344.96,46 cw(c344.96,43.46) 347.5,43.46 v2(347.5,22.5)
NetF204_1: F204.1 TP204*.1 TP204.1 | length 23.3
  Top Layer w0.5: TP204.1 280.46,4.102 ccw(c280.46,6.642) 283,6.642 ; F204.1 283,6.642 ; TP204*.1 285.54,4.102 cw(c285.54,6.642) 283,6.642
NetF204_2: F204.2 J201.5 | length 87.5
  Top Layer w0.5: F204.2 283,22.96 cw(c285.54,22.96) 285.54,25.5 J201.5
NetF205_1: F205.1 TP205*.1 TP205.1 | length 22.5
  Top Layer w0.5: TP205.1 261.46,55.102 cw(c261.46,52.562) F205.1@264,52.562 ; F205.1 F205.1@264,52.562 ; TP205*.1 266.54,55.102 ccw(c266.54,52.562) F205.1@264,52.562
NetF205_2: F205.2 J201.6 | length 111.9
  Top Layer w0.5: v2(264,47.5) F205.2 ; v2(344.5,28.5) J201.6
  Bottom Layer w0.5: v2(264,47.5) 264,46.54 ccw(c266.04,46.54) 266.04,44.5 341.46,44.5 cw(c341.46,40.96) 345,40.96 345,29 v2(344.5,28.5)
NetF206_1: F206.1 TP206*.1 TP206.1 | length 23.3
  Top Layer w0.5: TP206.1 240.46,4.102 ccw(c240.46,6.642) 243,6.642 ; F206.1 243,6.642 ; TP206*.1 245.54,4.102 cw(c245.54,6.642) 243,6.642
NetF206_2: F206.2 J201.7 | length 133.5
  Top Layer w0.5: F206.2 243,28.96 cw(c245.54,28.96) 245.54,31.5 J201.7
NetF207_1: F207.1 TP207*.1 TP207.1 | length 22.5
  Top Layer w0.5: TP207.1 221.46,55.102 cw(c221.46,52.562) F207.1@224,52.562 ; F207.1 F207.1@224,52.562 ; TP207*.1 226.54,55.102 ccw(c226.54,52.562) F207.1@224,52.562
NetF207_2: F207.2 J201.8 | length 146
  Top Layer w0.5: v2(224,45) F207.2 ; v2(340,34.5) J201.8
  Bottom Layer w0.5: v2(224,45) 260.791,45 cw(c260.793,42.632) 262.312,44.448 cw(c261.991,44.065) 262.481,44.163 ; 262.481,44.162 ccw(c263.213,44.307) 262.686,43.779 ccw(c263.6,44.693) 263.6,43.4 265.584,43.4 338.5,43.4 338.68,43.4 cw(c338.68,42.08) 340,42.082 cw(c338.68,42.08) 340,42.08 v2(340,34.5)
NetF208_1: F208.1 TP208.1 | length 12.8
  Top Layer w0.5: TP208.1 214.898,4.5 222.858,4.5 ccw(c222.858,6.642) 225,6.642 F208.1
NetF208_2: F208.2 J201.9 J201.10 J201.11 J201.12 | length 166.5
  Top Layer w0.5: F208.2 225,34.96 cw(c226.54,34.96) 226.54,36.5 355.5,36.5 ccw(c355.5,37.5) J201.9 J201.10 J201.11 J201.12
NetF300_1: F300.1 TP300.1 | length 11.5
  Top Layer w0.5: F300.1@185.637,7.363 185.638,7.263 F300.1@185.638,7.259 ; F300.1 186,6.642 ccw(c188.54,6.642) 188.54,4.102 TP300.1
NetF301_1: F301.1 TP301*.1 TP301.1 | length 22.4
  Top Layer w0.5: TP301.1 182.46,55 cw(c182.46,52.46) F301.1@185,52.46 ; F301.1 F301.1@185,52.46 ; TP301*.1 187.54,55 ccw(c187.54,52.46) F301.1@185,52.46
NetF301_2: F301.2 J301.2 | length 45
  Top Layer w0.5: F301.2 ccw(c185.075,49.575) 185.075,49.5 v2(186.5,49.5) ; v2(187,14.5) 190.791,14.5 190.793,14.5 ccw(c190.793,16.207) 191.818,14.842 ccw(c191.517,15.241) 192.012,15.171 192.012,15.172 cw(c193.25,15) 193.25,16.25 J301.2 J301.2@194,15.866
  Bottom Layer w0.5: v2(186.5,49.5) 186.5,49.446 187,48.946 v2(187,14.5)
NetF302_1: F302.1 TP302*.1 TP302.1 | length 23.3
  Top Layer w0.5: TP302.1 163.46,4.102 ccw(c163.46,6.642) 166,6.642 ; F302.1 166,6.642 ; TP302*.1 168.54,4.102 cw(c168.54,6.642) 166,6.642
NetF302_2: F302.2 J301.3 | length 34.3
  Top Layer w0.5: F302.2 166,13.365 cw(c168.735,13.365) 168.735,16.1 190.124,16.1 ccw(c189.5,18) 191.5,18 cw(c192.75,18) 192.75,19.25 J301.3
NetF303_1: F303.1 TP303*.1 TP303.1 | length 22.4
  Top Layer w0.5: TP303.1 144.46,55 cw(c144.46,52.46) F303.1@147,52.46 ; F303.1 F303.1@147,52.46 ; TP303*.1 149.54,55 ccw(c149.54,52.46) F303.1@147,52.46
NetF303_2: F303.2 J301.4 | length 74.6
  Top Layer w0.5: v2(146.5,23.5) 192.75,23.5 cw(c192.75,22.25) J301.4 ; v2(147,48.5) F303.2
  Bottom Layer w0.5: v2(146.5,23.5) 146.5,48 cw(c147,48) v2(147,48.5) v2@147,48.446
NetF304_1: F304.1 TP304*.1 TP304.1 | length 23.3
  Top Layer w0.5: TP304.1 124.46,4.102 ccw(c124.46,6.642) 127,6.642 ; F304.1 127,6.642 ; TP304*.1 129.54,4.102 cw(c129.54,6.642) 127,6.642
NetF304_2: F304.2 J301.5 | length 80.7
  Top Layer w0.5: F304.2 127,22.71 cw(c129.54,22.71) 129.54,25.25 J301.5
NetF305_1: F305.1 TP305*.1 TP305.1 | length 22.4
  Top Layer w0.5: TP305.1 104.46,55 cw(c104.46,52.46) F305.1@107,52.46 ; F305.1 F305.1@107,52.46 ; TP305*.1 109.54,55 ccw(c109.54,52.46) F305.1@107,52.46
NetF305_2: F305.2 J301.6 | length 108.3
  Top Layer w0.5: v2(106.9,48.403) 106.9,49.475 cw(c107,49.475) F305.2 ; v2(107,28.5) ccw(c107.25,28.5) 107.25,28.25 J301.6
  Bottom Layer w0.5: v2(106.9,48.403) cw(c106.9,48.303) 107,48.303 v2(107,28.5)
NetF306_1: F306.1 TP306*.1 TP306.1 | length 23.3
  Top Layer w0.5: TP306.1 84.46,4.102 ccw(c84.46,6.642) 87,6.642 ; F306.1 87,6.642 ; TP306*.1 89.54,4.102 cw(c89.54,6.642) 87,6.642
NetF306_2: F306.2 J301.7 | length 126.7
  Top Layer w0.5: F306.2 87,28.71 cw(c89.54,28.71) 89.54,31.25 J301.7
NetF307_1: F307.1 TP307*.1 TP307.1 | length 22.4
  Top Layer w0.5: TP307.1 66.46,55 cw(c66.46,52.46) F307.1@69,52.46 ; F307.1 F307.1@69,52.46 ; TP307*.1 71.54,55 ccw(c71.54,52.46) F307.1@69,52.46
NetF307_2: F307.2 J301.8 | length 140.4
  Top Layer w0.5: v2(68.817,48.241) 68.817,49.392 cw(c69,49.392) F307.2 ; v2(69,34.5) 193.75,34.5 J301.8
  Bottom Layer w0.5: v2(68.817,48.241) cw(c68.817,48.058) 69,48.058 v2(69,34.5)
NetF308_1: F308.1 TP308*.1 TP308.1 | length 23.3
  Top Layer w0.5: TP308.1 46.46,4.102 ccw(c46.46,6.642) 49,6.642 ; F308.1 49,6.642 ; TP308*.1 51.54,4.102 cw(c51.54,6.642) 49,6.642
NetF308_2: F308.2 J301.9 | length 168
  Top Layer w0.5: F308.2 53.925,10.425 ccw(c53.925,13.5) 57,13.5 57,31.5 cw(c61.5,31.5) 61.5,36 192.75,36 ccw(c192.75,37.25) J301.9
NetF309_1: F309.1 TP309*.1 TP309.1 | length 22.4
  Top Layer w0.5: TP309.1 27.46,55 cw(c27.46,52.46) F309.1@30,52.46 ; F309.1 F309.1@30,52.46 ; TP309*.1 32.54,55 ccw(c32.54,52.46) F309.1@30,52.46
NetF309_2: F309.2 J301.10 | length 174.2
  Top Layer w0.5: F309.2@30.336,49.239 F309.2 30.925,49.575 cw(c30.925,49) v2(31.5,49) v2@31.446,49 ; v2(56.5,42.5) 56.5,41.04 ccw(c59.04,41.04) 59.04,38.5 190,38.5 ccw(c190,39.5) 191,39.5 cw(c191.75,39.5) 191.75,40.25 J301.10
  Bottom Layer w0.5: v2(31.5,49) 53.96,49 cw(c53.96,46.46) 56.5,46.46 v2(56.5,42.5)
NetF310_1: F310.1 TP310.1 | length 12.9
  Top Layer w0.5: TP310.1 27.46,4.102 ccw(c27.46,6.642) 30,6.642 F310.1
NetF310_2: F310.2 J301.11 J301.12 | length 199.9
  Top Layer w0.5: F310.2 30,41.46 cw(c32.54,41.46) 32.54,44 193.25,44 cw(c193.25,43.25) J301.11 J301.12
NetJ102_1: J102.1 NTC101.2 | length 204.2
  Bottom Layer w0.5: J102.1@371,39.616 J102.1 372.5,40 cw(c372.5,38.5) 374,38.5 ccw(c376,38.5) 376,36.5 377.5,36.5 410.207,36.5 cw(c410.207,31.207) 415.5,31.207 415.5,22.718 ccw(c422.718,22.718) 422.718,15.5 511.867,15.5 ccw(c511.867,18.633) 515,18.633 515,49.5 cw(c517,49.5) 517,51.5 ccw(c517,53) 518.5,53 NTC101.2
  other v1: 518.5,56 518.5,58
NetJ102_2: J102.2 NTC102.2 | length 158.5
  Bottom Layer w0.5: J102.2 372,37 cw(c372,36) 373,36 ccw(c374.5,36) 374.5,34.5 375.5,34.5 399.457,34.5 cw(c399.457,30.457) 403.5,30.457 403.5,13.54 ccw(c406.04,13.54) 406.04,11 407.5,11 496.96,11 cw(c496.96,8.46) 499.5,8.46 NTC102.2
  other v1: 499.5,1 499.5,3
NetJ102_3: J102.3 NTC103.2 | length 135
  Bottom Layer w0.5: J102.3 370.54,34 cw(c370.54,36.54) 368,36.54 368,48.96 cw(c370.54,48.96) 370.54,51.5 477.71,51.5 ccw(c477.71,54.04) 480.25,54.04 NTC103.2
  other v1: 480,56 480,58
NetJ102_4: J102.4 NTC104.2 | length 113.4
  Bottom Layer w0.5: J102.4 391.103,31 cw(c391.103,26.603) 395.5,26.603 395.5,11.223 ccw(c399.223,11.223) 399.223,7.5 457.46,7.5 cw(c457.46,4.96) 460,4.96 NTC104.2
  other v1: 460,1 460,3
NetJ102_5: J102.5 NTC105.1 | length 102.2
  Bottom Layer w0.5: J102.5 370.04,28 cw(c370.04,32.04) 366,32.04 366,49.96 cw(c370.04,49.96) 370.04,54 436.21,54 ccw(c436.21,56.54) 438.75,56.54 NTC105.1
  other v1: 439,56 439,58
NetJ102_6: J102.6 NTC106.1 | length 66
  Bottom Layer w0.5: J102.6 380,25 cw(c380,22.5) 382.5,22.5 382.5,10.54 ccw(c391.04,10.54) 391.04,2 NTC106.1
  other v1: 419,1 419,3
NetJ102_7: J102.7 NTC107.1 | length 72.7
  Bottom Layer w0.5: J102.7 368.04,22 cw(c368.04,25.54) 364.5,25.54 364.5,53.46 cw(c368.04,53.46) 368.04,57 NTC107.1
  other v1: 399,56 399,58
NetJ102_8: J102.8 NTC108.1 | length 23.7
  Bottom Layer w0.5: J102.8 371,4.54 ccw(c373.54,4.54) 373.54,2 NTC108.1
  other v1: 379,1 379,3
NetJ202_1: J202.1 NTC201.2 | length 167.2
  Top Layer w0.5: v2(338,41.5) cw(c340,41.5) 340,43.5 350.5,43.5 ccw(c350.5,45.5) 352.5,45.5 v2(352.5,47)
  Bottom Layer w0.5: J202.1 217.5,40.5 cw(c217.5,39.5) 218.5,39.5 ccw(c220,39.5) 220,38 224.5,38 ccw(c224.5,39.5) 226,39.5 cw(c228.5,39.5) 228.5,42 231.5,42 337.5,42 cw(c337.5,41.5) v2(338,41.5) ; v2(352.5,47) 352.5,49.46 cw(c355.04,49.46) 355.04,52 358,52 ccw(c358,53.75) 359.75,53.75 NTC201.2
  other v1: 360,56 360,58
NetJ202_2: J202.2 NTC202.2 | length 163.9
  Bottom Layer w0.5: J202.2 ccw(c209.5,37.5) 209.5,36.5 223.5,36.5 cw(c223.5,33.5) 226.5,33.5 226.5,17.04 ccw(c229.04,17.04) 229.04,14.5 338.21,14.5 cw(c338.21,11.96) 340.75,11.96 NTC202.2
  other v1: 341,1 341,3
NetJ202_3: J202.3 NTC203.2 | length 135.2
  Bottom Layer w0.5: J202.3 cw(c208.5,37) 206,37 206,43.96 cw(c208.54,43.96) 208.54,46.5 260.5,46.5 ccw(c260.5,47.5) 261.5,47.5 cw(c263,47.5) 263,49 317.71,49 ccw(c317.71,52.04) 320.75,52.04 NTC203.2
  other v1: 321,56 321,58
NetJ202_4: J202.4 NTC204.2 | length 118.9
  Bottom Layer w0.5: J202.4 220.96,31.5 cw(c220.96,27.46) 225,27.46 225,15 ccw(c227.5,15) 227.5,12.5 299.21,12.5 cw(c299.21,9.96) 301.75,9.96 NTC204.2
  other v1: 302,1 302,3
NetJ202_5: J202.5 NTC205.1 | length 105.1
  Bottom Layer w0.5: J202.5@208.493,28.541 cw(c207.889,31.875) 204.5,31.875 204.5,44.13 204.5,44.133 204.5,45.46 cw(c207.04,45.46) 207.04,48 259,48 ccw(c259,49) 260,49 260,49.5 cw(c261.5,49.5) 261.5,51 279.21,51 ccw(c279.21,53.54) 281.75,53.54 NTC205.1
  other v1: 282,56 282,58
NetJ202_6: J202.6 NTC206.1 | length 74.5
  Bottom Layer w0.5: J202.6 215.96,25.5 cw(c215.96,22.96) 218.5,22.96 218.5,11.54 ccw(c221.04,11.54) 221.04,9 260.21,9 cw(c260.21,6.46) 262.75,6.46 NTC206.1
  other v1: 263,1 263,3
NetJ202_7: J202.7 NTC207.1 | length 74
  Bottom Layer w0.5: J202.7 206.54,22.5 cw(c206.54,26.04) 203,26.04 203,45.264 cw(c207.236,45.264) 207.236,49.5 216,49.5 ccw(c216,52.5) 219,52.5 219,54.46 cw(c221.54,54.46) 221.54,57 NTC207.1
  other v1: 243,56 243,58
NetJ202_8: J202.8 NTC208.1 | length 31.7
  Bottom Layer w0.5: J202.8 208.5,4.54 ccw(c211.04,4.54) 211.04,2 NTC208.1
  other v1: 224,1 224,3
NetJ302_1: J302.1 NTC301.2 | length 174.5
  Bottom Layer w0.5: J302.1 47,39 cw(c47,38) 48,38 ccw(c49.5,38) 49.5,36.5 62.599,36.5 ccw(c62.599,39.04) 65.139,39.04 65.139,45.917 cw(c70.222,45.917) 70.222,51 186.46,51 ccw(c186.46,53.54) 189,53.54 189,55 cw(c191,55) 191,57 NTC301.2
  other v1: 204,56 204,58
NetJ302_2: J302.2 NTC302.2 | length 167.1
  Bottom Layer w0.5: J302.2 47,36 cw(c47,35) 48,35 48,34 ccw(c49.5,34) 49.5,32.5 78.46,32.5 cw(c78.46,29.96) 81,29.96 81,17.54 ccw(c83.54,17.54) 83.54,15 180.46,15 cw(c180.46,11.71) 183.75,11.71 NTC302.2
  other v1: 184,1 184,3
NetJ302_3: J302.3 NTC303.2 | length 152.6
  Top Layer w0.5: v2(40,46) 162.21,46 ccw(c162.21,48.54) 164.75,48.54 NTC303.2
  Bottom Layer w0.5: v2(40,46) 40,35.54 ccw(c42.54,35.54) 42.54,33 J302.3
  other v1: 165,56 165,58
NetJ302_4: J302.4 NTC304.2 | length 124.5
  Bottom Layer w0.5: J302.4 72.96,30 cw(c72.96,27.46) 75.5,27.46 75.5,16.04 ccw(c78.04,16.04) 78.04,13.5 143.21,13.5 cw(c143.21,10.96) 145.75,10.96 NTC304.2
  other v1: 146,1 146,3
NetJ302_5: J302.5 NTC305.1 | length 140.5
  Bottom Layer w0.5: J302.5 31.54,27 cw(c31.54,29.54) 29,29.54 29,51 cw(c31.5,51) 31.5,53.5 123.21,53.5 ccw(c123.21,56.04) 125.75,56.04 NTC305.1
  other v1: 126,56 126,58
NetJ302_6: J302.6 NTC306.1 | length 79.5
  Bottom Layer w0.5: J302.6 68.46,24 cw(c68.46,21.46) 71,21.46 71,13.54 ccw(c73.54,13.54) 73.54,11 104.21,11 cw(c104.21,8.46) 106.75,8.46 NTC306.1
  other v1: 107,1 107,3
NetJ302_7: J302.7 NTC307.1 | length 113.6
  Bottom Layer w0.5: J302.7 29.04,21 cw(c29.04,23.54) 26.5,23.54 26.5,54.46 cw(c29.04,54.46) 29.04,57 NTC307.1
  other v1: 87,56 87,58
NetJ302_8: J302.8 NTC308.1 | length 35.2
  Bottom Layer w0.5: J302.8 48.5,18 cw(c48.5,17) 49.5,17 ccw(c51,17) 51,15.5 64.421,15.5 cw(c64.421,12.171) 67.75,12.171 NTC308.1
  other v1: 68,1 68,3
copper on no net:
  other v3: 192.1,10.1 517.1,10.1 354.6,10.35 47.9,15.15 372.9,16.15 210.4,16.65 47.9,42.15 372.9,43.15 210.4,43.65 192.1,49.1 517.1,49.1 354.6,49.35

## Silkscreen, mask and mechanical layers (free items; w line width, h text height)
Top Overlay:
  drawing of 56 lines, arcs and shapes, not listed
  text "Voltages" at 197.83,42.562 h3 r270
  text "Voltages" at 359.83,41.562 h3 r270
  text "Voltages" at 522.83,41.062 h3 r270
  text "Slave 2" at 145.385,38 h10
  text "Slave 1" at 311.987,38 h10
  text "Slave 0" at 475.274,37 h10
  text "Slave 5" at 145.344,33 h10
  text "Slave 4" at 311.121,33 h10
  text "Slave 3" at 475.362,32 h10
  text "Slave 7" at 145.515,28 h10
  text "Slave 7" at 311.515,28 h10
  text "Slave 6" at 475.283,27 h10
  text "Slave 11" at 144.876,23 h10
  text "Slave 10" at 310.163,23 h10
  text "Slave 9" at 475.311,22 h10
  text "+" at 20.534,19.295 h50
  text "TS" at 111.88,18 h20
  text "Slave 14" at 144.01,18 h10
  text "TS" at 276.88,18 h20
  text "Slave 13" at 310.251,18 h10
  text "TS" at 440.88,18 h20
  text "Slave 12" at 474.274,17 h10
  text "Temperatures" at 204.731,16.27 h3 r90
  text "Temperatures" at 367.231,15.27 h3 r90
  text "Temperatures" at 42.231,14.77 h3 r90
  text "-" at 531.142,12.619 h80
Bottom Overlay:
  drawing of 50 lines, arcs and shapes, not listed
  text "Accumulator HotDog" at 514.73,25.754 h25
  text "David Redondo - 2022" at 297.698,13 h5